# EAGLE board h-bridge (EAGLE 6.0)
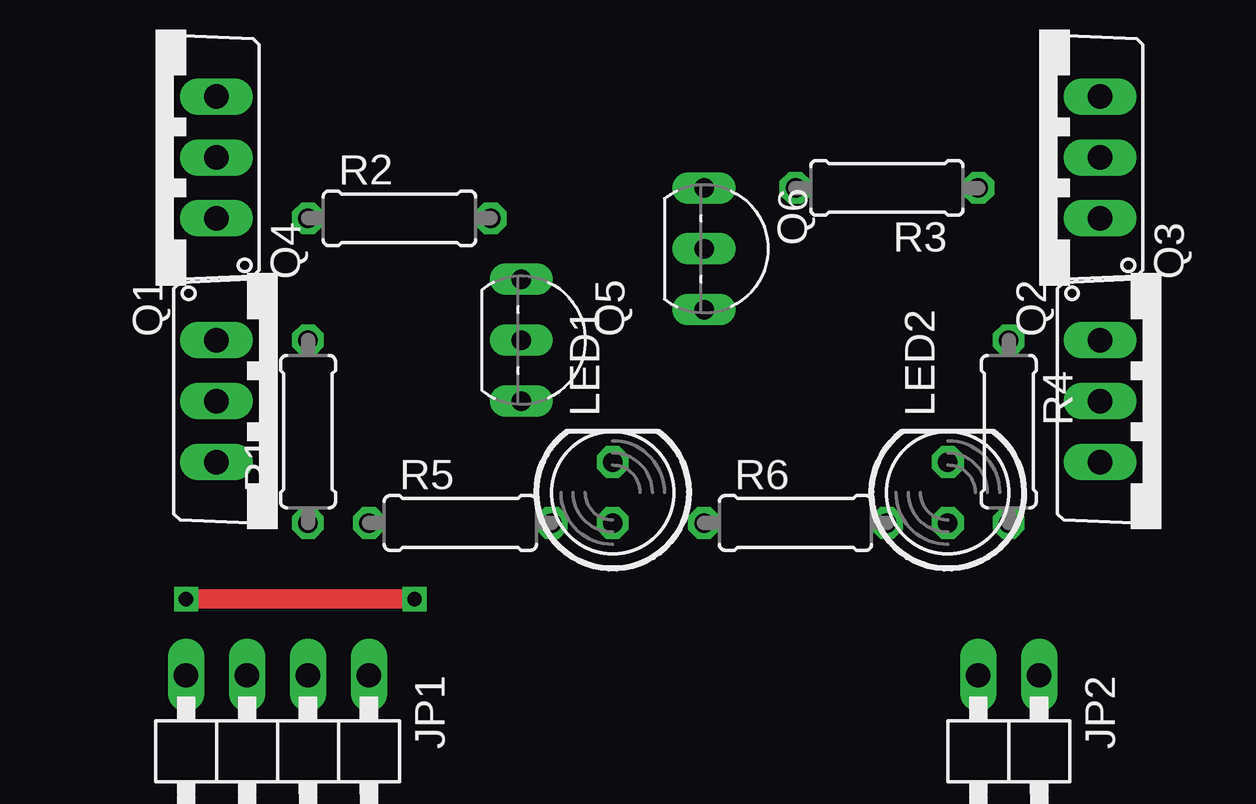
[diagram p0: board, top side]
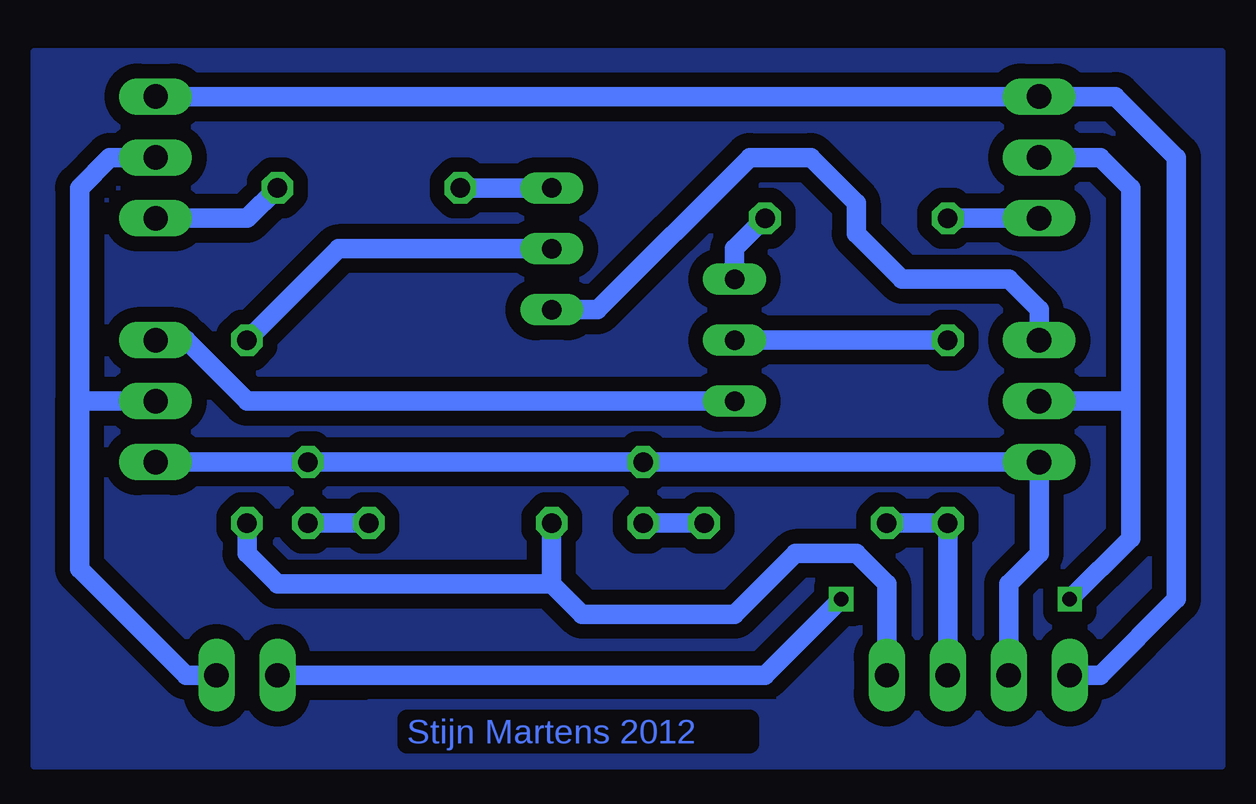
[diagram p1: board, bottom side, seen from below]

No outline drawn. Coordinates in mm, seen from the top.
Copper layers (1*16): Top 0.035mm / dielectric 1.5mm / Bottom 0.035mm
Design rules: minimum track width 10mil, minimum drill 24mil, track to track 8mil, track to pad 8mil, pad to pad 8mil, via to via 8mil, smd to smd 8mil, copper to edge 40mil, drill to drill 8mil, minimum pad ring 10mil, minimum via ring 8mil, stop-mask expansion 4mil, vias tented up to drill 0mil, thermal gap 10mil

## Footprints (pad centres in the part's own frame; a part is rotated, then mirrored left to right if it is on the bottom)
1X04/90 = drill 1.016 long: 1 -3.81,-3.81; 2 -1.27,-3.81; 3 1.27,-3.81; 4 3.81,-3.81
1X02/90 = drill 1.016 long: 1 -1.27,-3.81; 2 1.27,-3.81
LED5MM = drill 0.813 octagon: A -1.27,0; K 1.27,0
TO220AV = drill 1.016 long: B -2.54,-2.54; C 0,-2.54; E 2.54,-2.54
TO92-CBE = drill 0.813 long: B 0,0; C -2.54,0; E 2.54,0
0207/7 = drill 0.813 octagon: 1 -3.81,0; 2 3.81,0

## Placement (x,y rotation side)
JP1  [1X04/90]  10.16,0 180 top
JP2  [1X02/90]  40.64,0 180 top
LED1  [LED5MM]  24.13,11.43 90 top
LED2  [LED5MM]  38.1,11.43 90 top
Q1  TIP122  [TO220AV]  10.16,15.24 270 top
Q2  TIP122  [TO220AV]  46.99,15.24 270 top
Q3  TIP127  [TO220AV]  41.91,25.4 90 top
Q4  TIP127  [TO220AV]  5.08,25.4 90 top
Q5  BC547B  [TO92-CBE]  20.32,17.78 270 top
Q6  BC547B  [TO92-CBE]  27.94,21.59 270 top
R1  1k  [0207/7]  11.43,13.97 90 top
R2  1k  [0207/7]  15.24,22.86 0 top
R3  1k  [0207/7]  35.56,24.13 180 top
R4  1k  [0207/7]  40.64,13.97 270 top
R5  100  [0207/7]  17.78,10.16 0 top
R6  100  [0207/7]  31.75,10.16 0 top

## Library data of the parts
JP1 JP2 = pinhead
LED1 LED2 = led
Q1-Q4 = transistor-power
Q5 Q6 = transistor
R1-R6 = rcl

## Nets
GND: JP1.3 LED1.K LED2.K Q1.E Q2.E
N$1: Q5.C R2.2
N$2: JP2.2 Q1.C Q4.C
N$3: JP2.1 Q2.C Q3.C
N$4: JP1.4 Q3.E Q4.E
N$5: Q5.B R1.2
N$6: Q4.B R2.1
N$7: Q3.B R3.1
N$8: Q6.C R3.2
N$9: Q2.B Q5.E
N$10: Q6.B R4.1
N$12: JP1.1 R4.2 R6.1
N$13: Q1.B Q6.E
N$14: LED1.A R5.2
N$15: LED2.A R6.2
N$16: JP1.2 R1.1 R5.1

## Tracks (layer width: path | path; a pad name or v marks a point on that pad's centre or on a via)
GND
  Bottom 0.813: Q2.E LED2.K LED1.K Q1.E 7.62,8.89 8.89,7.62 JP1.3
N$1
  Bottom 0.813: Q5.C 20.32,21.59 R2.2
N$2  (via drill 0.6)
  Top 0.813: v6.35,6.99 v15.88,6.99
  Bottom 0.813: Q1.C 3.81,15.24 | v6.35,6.99 3.81,9.53 3.81,15.24 | 3.81,15.24 3.81,24.13 5.08,25.4 Q4.C | JP2.2 19.05,3.81 v15.88,6.99
N$3
  Bottom 0.813: Q3.C 46.35,25.4 47.62,24.13 47.62,15.24 | JP2.1 43.18,3.81 47.62,8.26 47.62,15.24 | 47.62,15.24 Q2.C
N$4
  Bottom 0.813: Q3.E Q4.E 4.45,27.94 1.91,25.4 1.91,6.99 5.08,3.81 JP1.4
N$5
  Bottom 0.813: R1.2 Q5.B
N$6
  Bottom 0.813: Q4.B R2.1
N$7
  Bottom 0.813: Q3.B 40.64,22.86 R3.1
N$8
  Bottom 0.813: Q6.C R3.2
N$9
  Bottom 0.813: Q2.B 43.18,17.78 40.64,15.24 Q5.E
N$10
  Bottom 0.813: Q6.B 36.83,21.59 R4.1
N$11
  pour Bottom (isolate 0.61): 0,0 16.51,0 16.51,2.86 35.56,2.86 35.56,0 49.53,0 49.53,29.84 0,29.84
N$12
  Bottom 0.813: JP1.1 13.97,7.62 15.24,8.89 17.78,8.89 20.32,6.35 26.67,6.35 27.94,7.62 | R4.2 40.64,8.89 39.37,7.62 27.94,7.62 | 27.94,7.62 R6.1
N$13
  Bottom 0.813: Q6.E 26.04,19.05 19.68,25.4 17.14,25.4 15.24,23.5 15.24,22.23 13.34,20.32 8.89,20.32 7.62,19.05 Q1.B
N$14
  Bottom 0.813: LED1.A R5.2
N$15
  Bottom 0.813: LED2.A R6.2
N$16
  Bottom 0.813: R5.1 R1.1 JP1.2
N$17
  pour Bottom (isolate 0.406, no thermals): 16.51,0 35.56,0 35.56,2.7 16.51,2.7

## Text on the board
Bottom: Stijn Martens 2012